# Altium PCB Main.PcbDoc (part 1 of 2)
Units mil, origin at the board's own origin, x right, y up, seen from the top; angles counter-clockwise.
Board outline 3937.01 x 3937.01 mil, 2 copper layers (Top Layer, Bottom Layer); 174 components, 113 nets, 601 pads, 322 vias.
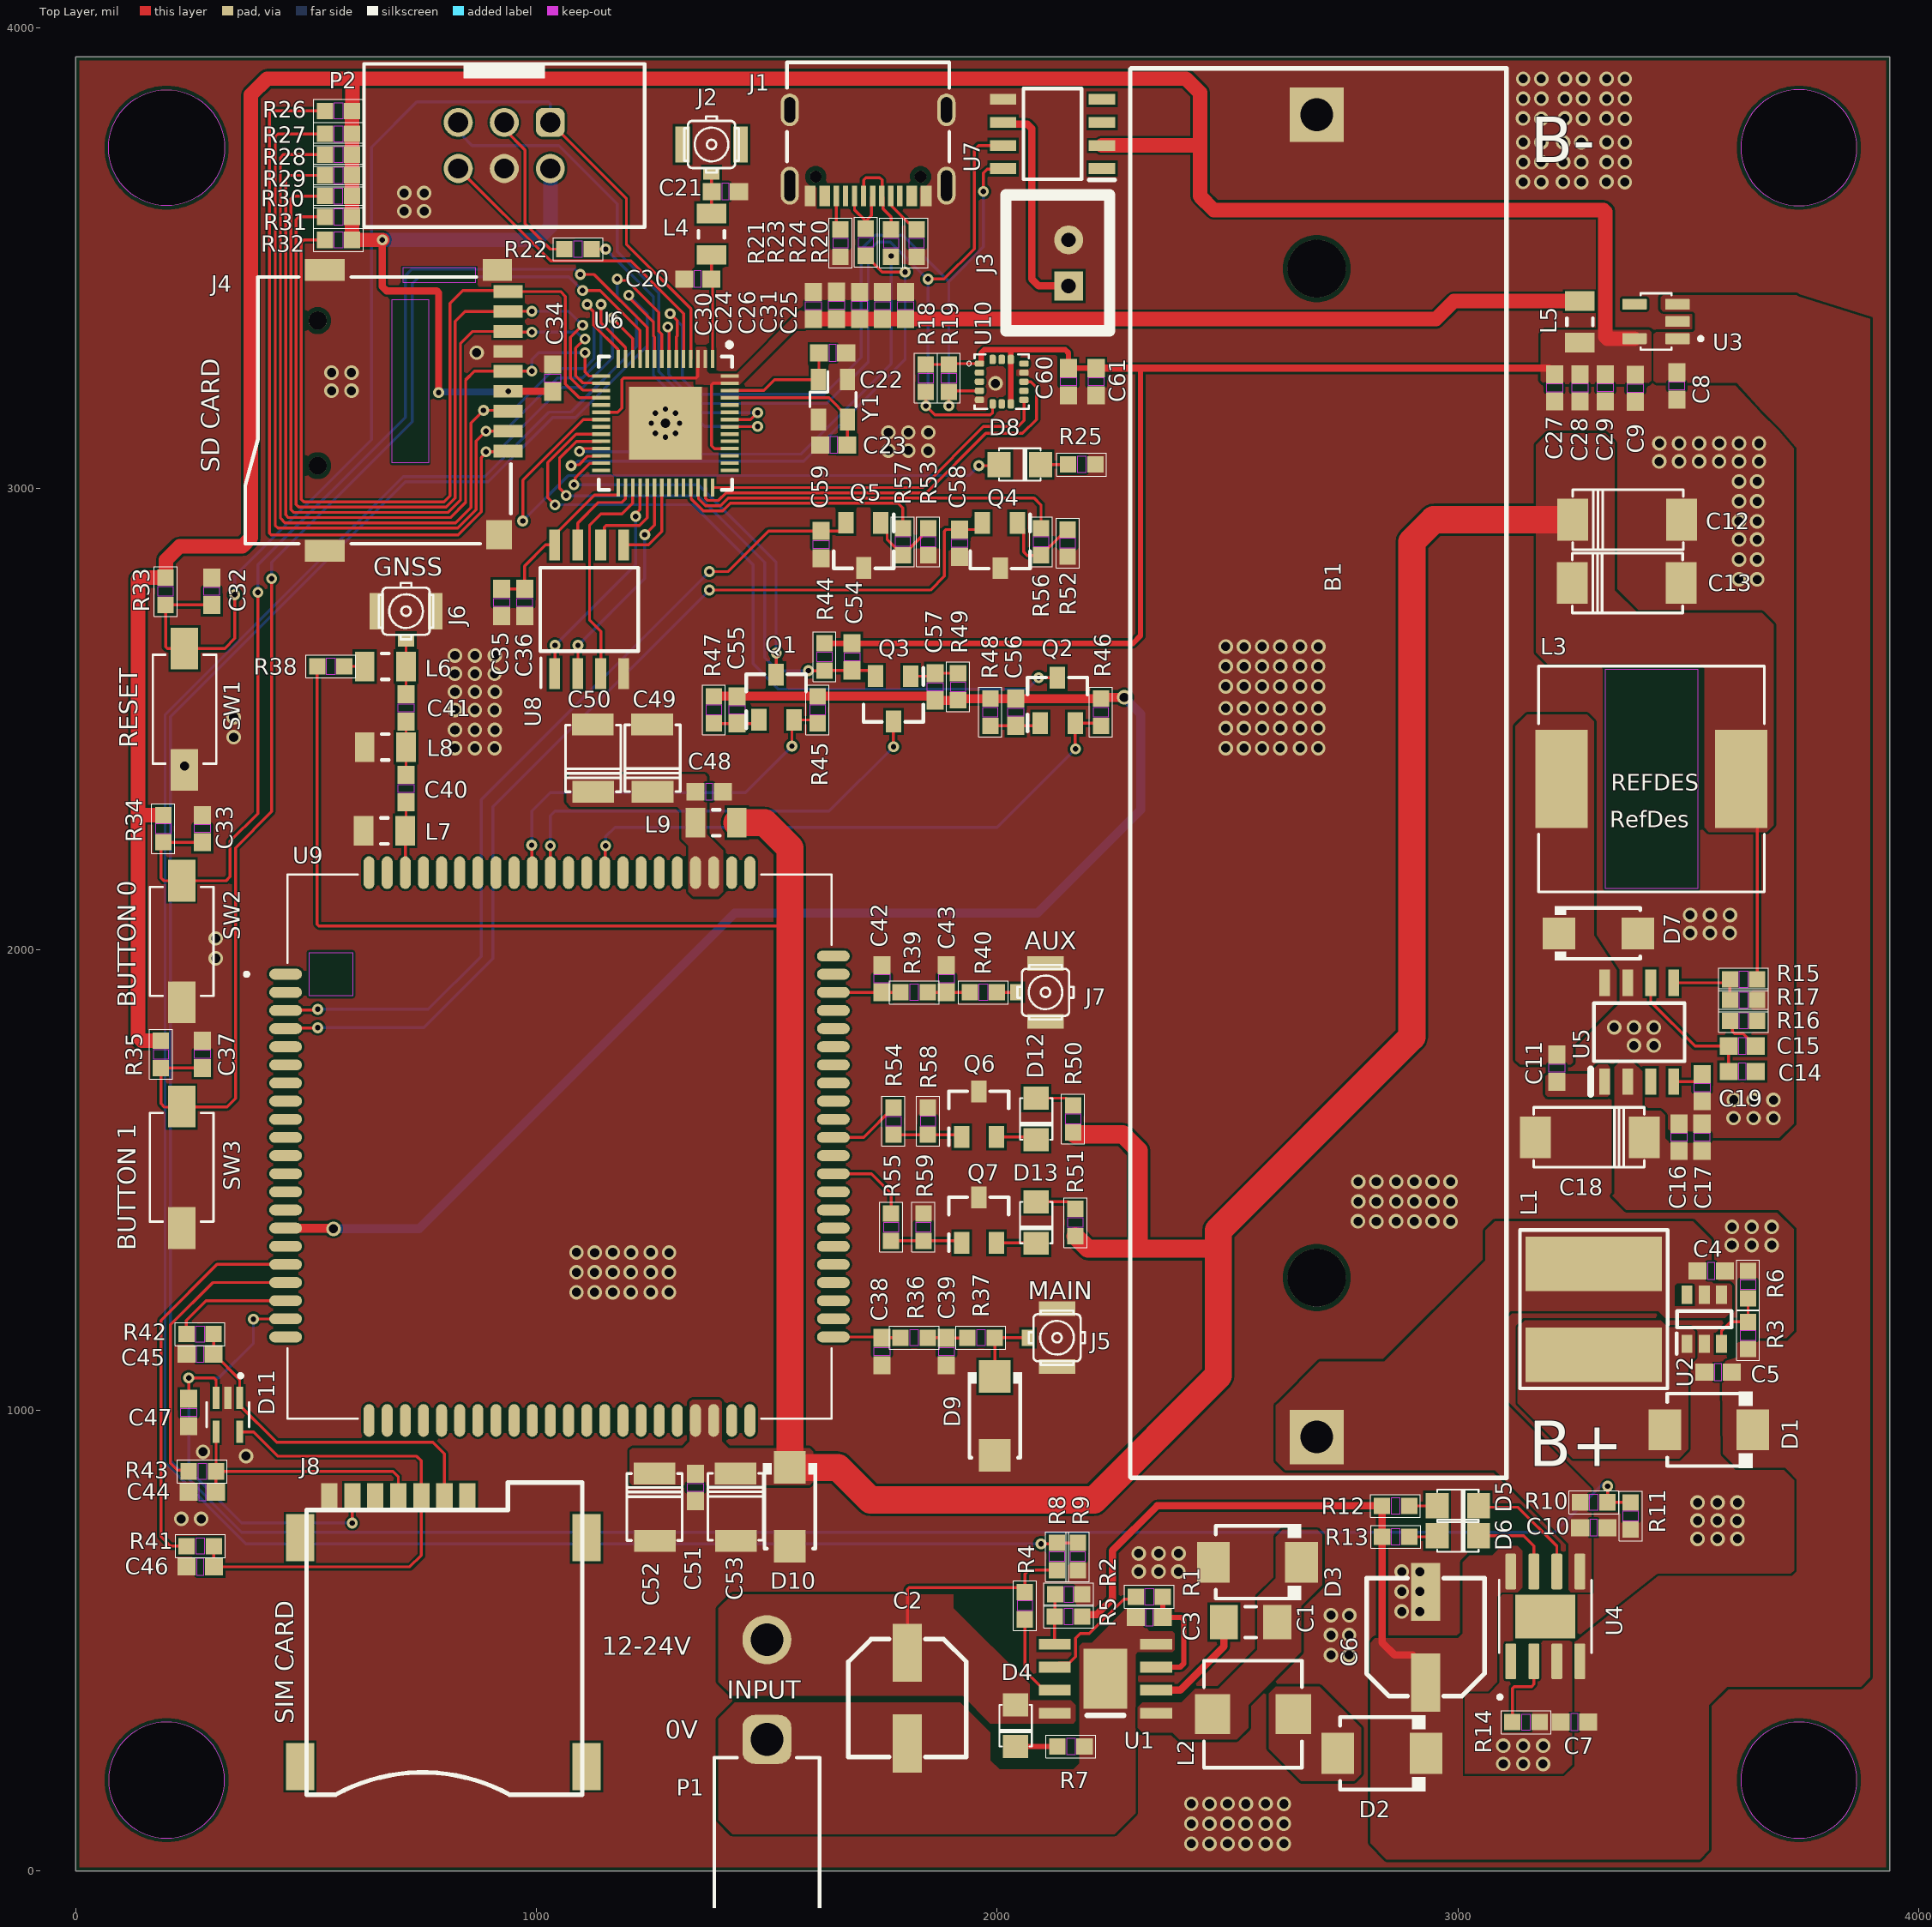
[diagram p0: Top Layer view]
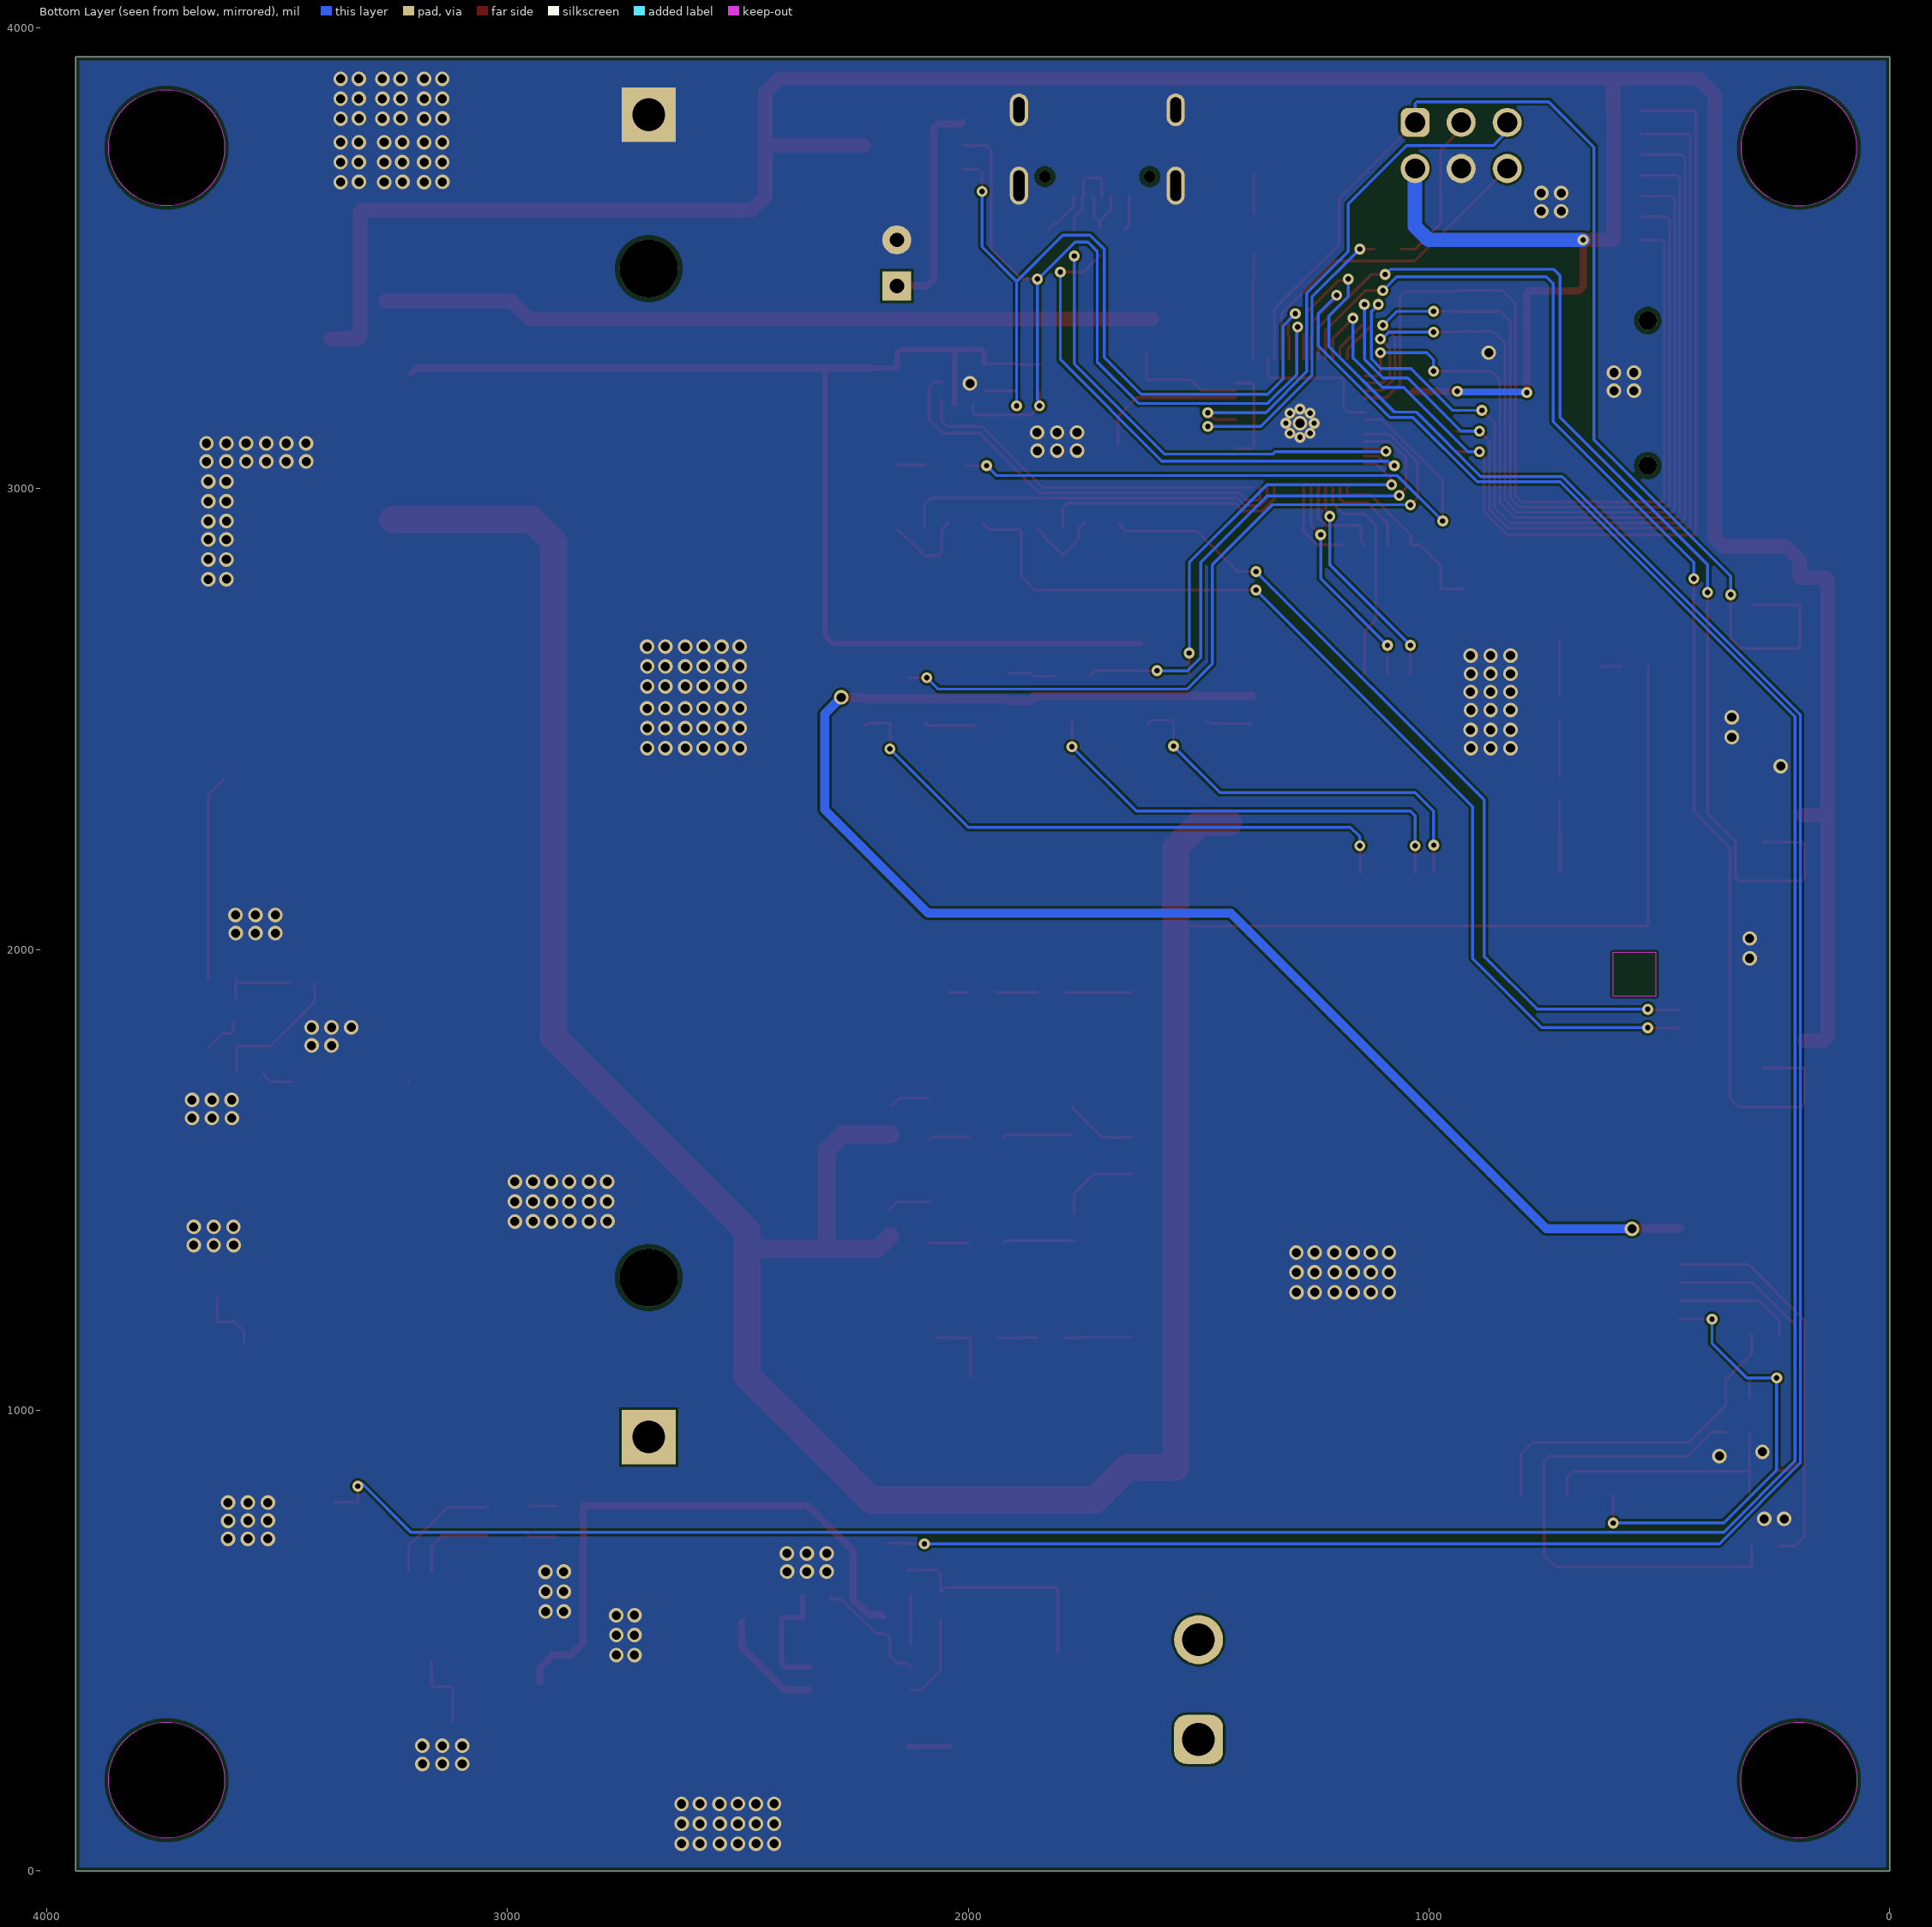
[diagram p1: Bottom Layer view, seen from below]
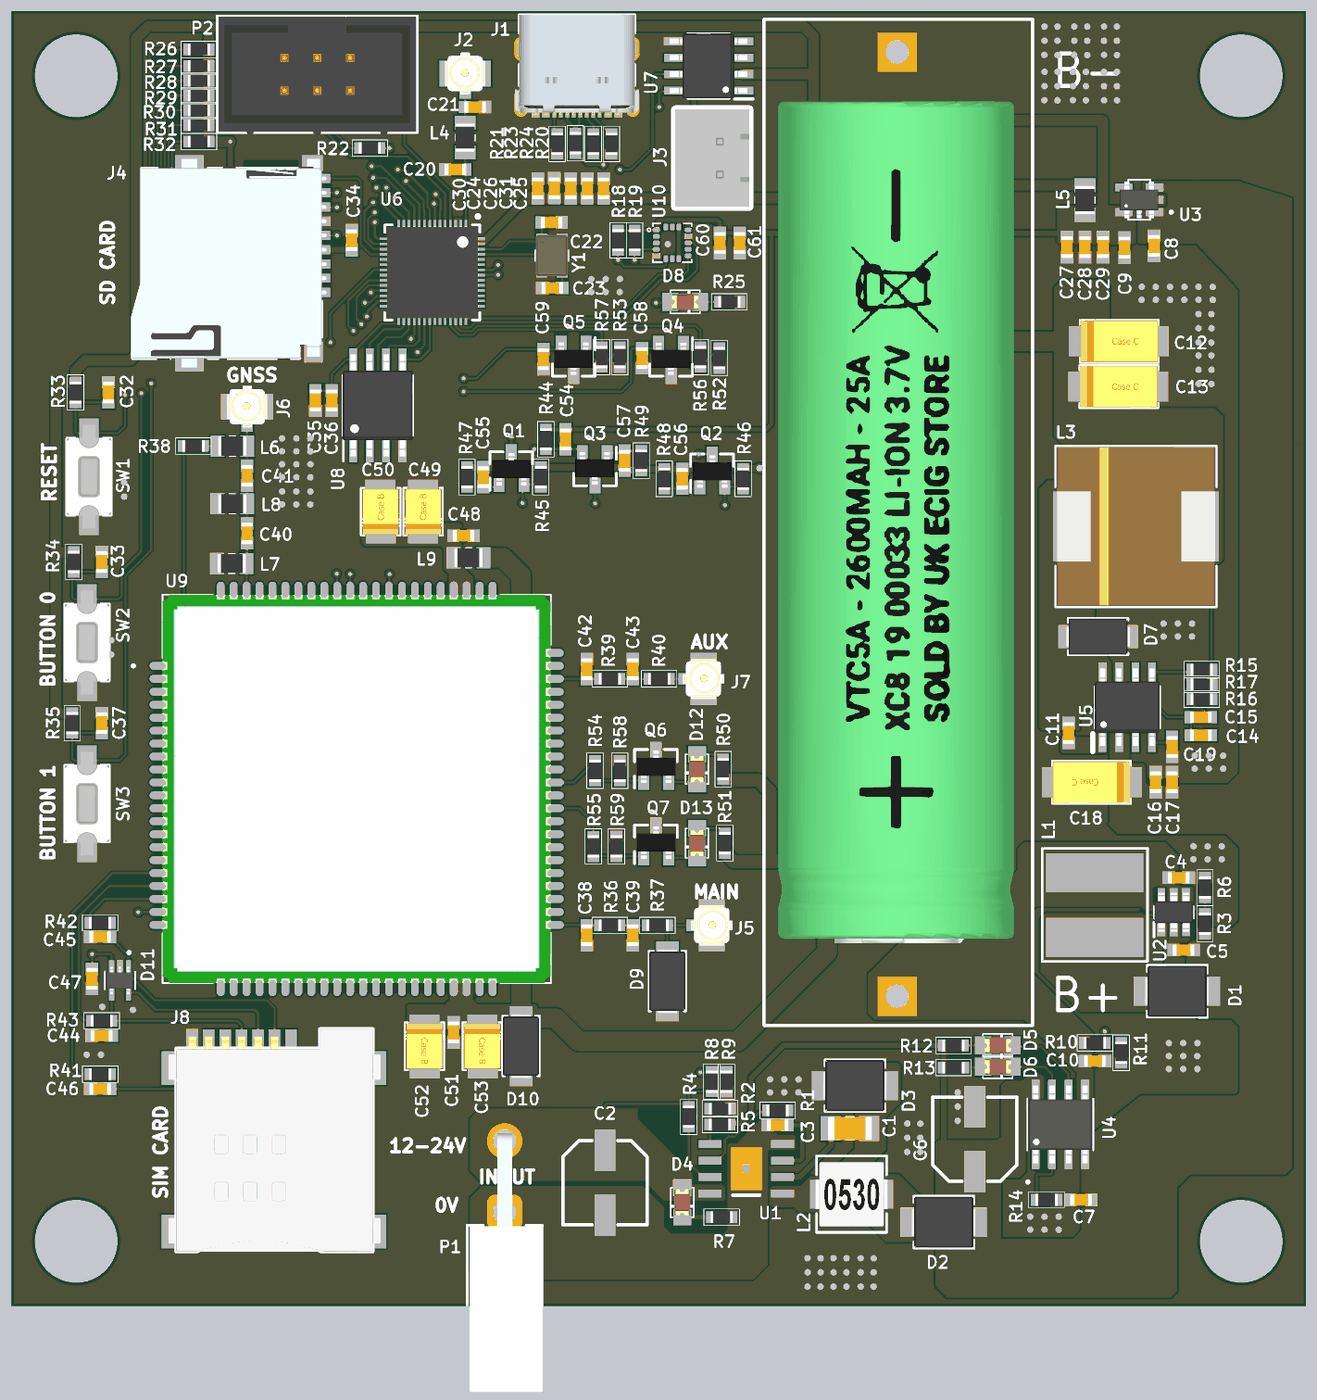
[diagram p3: 3D render of the assembled board from above, using the file's embedded part models]

## Layer stack, top to bottom
Top Solder: solder mask 0.4, Solder Resist, Dk 3.5
Top Layer: signal copper 1.4
Dielectric 1: dielectric 12.6, FR-4, Dk 4.8
Bottom Layer: signal copper 1.4
Bottom Solder: solder mask 0.4, Solder Resist, Dk 3.5

## Board outline
0,0 3937.01,0 3937.01,3937.01 0,3937.01
cut-out: 3614.17,3740.16 ccw(c3740.16,3740.16) 3740.16,3614.17 ccw(c3740.16,3740.16) 3866.14,3740.16 ccw(c3740.16,3740.16) 3740.16,3866.14 ccw(c3740.16,3740.16)
cut-out: 3614.17,196.85 ccw(c3740.16,196.85) 3740.16,70.87 ccw(c3740.16,196.85) 3866.14,196.85 ccw(c3740.16,196.85) 3740.16,322.84 ccw(c3740.16,196.85)
cut-out: 196.85,3614.17 cw(c196.85,3740.16) 70.87,3740.16 cw(c196.85,3740.16) 196.85,3866.14 cw(c196.85,3740.16) 322.83,3740.16 cw(c196.85,3740.16)
cut-out: 70.87,196.85 ccw(c196.85,196.85) 196.85,70.87 ccw(c196.85,196.85) 322.83,196.85 ccw(c196.85,196.85) 196.85,322.84 ccw(c196.85,196.85)

## Design rules (kind name [scope] priority, off if disabled: settings)
BoardOutlineClearance [All] p1: gap=7.87 ignorepadtopadclearanceinfootprint=FALSE
Clearance [All] p1: gap=5 ignorepadtopadclearanceinfootprint=TRUE except(9.84: Arc-Hole Track-Hole SMDPad-Hole THPad-Hole Via-Hole Fill-Hole Poly-Hole Region-Hole Text-Hole)
ComponentClearance [All] p1: gap=5 collisioncheckmode=3 verticalgap=5 showdistances=TRUE
DiffPairsRouting [All] p1: maxlimit=10 minlimit=5 mostfreqgap=5 toplayer_minwidth=5 toplayer_maxwidth=1000 toplayer_prefwidth=5 bottomlayer_minwidth=5 bottomlayer_maxwidth=1000 bottomlayer_prefwidth=5 maxuncoupledlength=500
Height [All] p1: minheight=0 maxheight=71497.94 prefheight=500
HoleSize [All] p1: absolutevalues=TRUE maxlimit=248.03 minlimit=11.81 maxpercent=80.000 minpercent=20.000
HoleToHoleClearance [All] p1: gap=9.84 allowstackedmicrovias=FALSE
MinimumAnnularRing [All] p1: minimumring=3
MinimumSolderMaskSliver [All] p1: minsoldermaskwidth=0
PlaneClearance [All] p1: clearance=5
PlaneConnect PlaneConnectPowerPads [InPadClass('PowerPads')] p1: planeconnectstyle=Direct reliefexpansion=20 reliefentries=4 reliefconductorwidth=10 reliefairgap=10
PlaneConnect [All] p2: pad.planeconnectstyle=Relief pad.reliefexpansion=11.81 pad.reliefentries=4 pad.reliefconductorwidth=5 pad.reliefairgap=5 via.planeconnectstyle=Direct via.reliefexpansion=11.81 via.reliefentries=4 via.reliefconductorwidth=5 via.reliefairgap=5
PolygonConnect PolygonConnectPowerPads [All vs (InPadClass('PowerPads'))] p1: connectstyle=Direct reliefconductorwidth=10 reliefentries=4 polygonreliefangle="90 Angle" airgapwidth=10
PolygonConnect [All] p2: connectstyle=Direct reliefconductorwidth=5 reliefentries=4 polygonreliefangle="90 Angle" airgapwidth=5
RoutingVias [All] p1: holewidth=11.81 width=23.62 viastyle="Through Hole" minholewidth=11.81 minwidth=23.62 maxholewidth=23.62 maxwidth=259.84
SilkToSilkClearance [All] p1: silktosilkclearance=0
SilkToSolderMaskClearance [IsPad] p1: minsilkscreentomaskgap=5 clearancetoexposedcopper=TRUE
SolderMaskExpansion [All] p1: expansion=0.5 istentingtop=FALSE
SupplyNets "Schematic Supply Nets_2" [InNet('+12V')] p1: voltage=0.000
SupplyNets "Schematic Supply Nets_8" [InNet('V-MCU')] p2: voltage=0.000
SupplyNets "Schematic Supply Nets_6" [InNet('V-SIM')] p3: voltage=0.000
SupplyNets "Schematic Supply Nets_7" [InNet('BATTERY-')] p4: voltage=0.000
SupplyNets "Schematic Supply Nets_5" [InNet('+1.8V')] p5: voltage=0.000
SupplyNets "Schematic Supply Nets_4" [InNet('+5V')] p6: voltage=0.000
SupplyNets "Schematic Supply Nets_1" [InNet('FL-VDD')] p7: voltage=0.000
SupplyNets "Schematic Supply Nets" [InNet('+3.3V-MCU')] p8: voltage=0.000
Width [All] p1: maxlimit=1000 minlimit=6.3 preferedwidth=6.3 minimp=50.000000 maximp=50.000000 favimp=50.000000
20 further rules are at their usual default settings.

## Classes and differential pairs
net class POWER: +5V V-MCU V-SIM
component class U_SIM7600CE: C38 C39 C40 C41 C42 C43 C44 C45 C46 C47 C48 C49 C50 C51 C52 C53 C54 C55 C56 C57 C58 C59 D9 D10 D11 D12 D13 J5 J6 J7 J8 L6 L7 L8 L9 Q1 Q2 Q3 Q4 Q5 Q6 Q7 R36 R37 R38 R39 R40 R41 R42 R43 R44 R45 R46 R47 R48 R49 R50 R51 R52 R53 R54 R55 R56 R57 R58 R59 U9
component class U_Power: B1 C1 C2 C3 C4 C5 C6 C7 C8 C9 C10 C11 C12 C13 C14 C15 C16 C17 C18 C19 D1 D2 D3 D4 D5 D6 D7 L1 L2 L3 P1 R1 R2 R3 R4 R5 R6 R7 R8 R9 R10 R11 R12 R13 R14 R15 R16 R17 U1 U2 U3 U4 U5
component class U_LIS3DH: C60 C61 U10
component class U_ESP32S3: C20 C21 C22 C23 C24 C25 C26 C27 C28 C29 C30 C31 C32 C33 C34 C35 C36 C37 D8 J1 J2 J3 J4 L4 L5 P2 R18 R19 R20 R21 R22 R23 R24 R25 R26 R27 R28 R29 R30 R31 R32 R33 R34 R35 SW1 SW2 SW3 U6 U7 U8 Y1

## Components (designator, comment, footprint, x,y, rotation, side; value= is the part's Value field where it differs from the comment)
B1 "21700-1C" 18650-2C 2279.75,2372.19 r90 top
C1 "0.1uF" CAP_1206 2550,540 r0 top
C2 "22u" ALU-SMD-CAP-D-6.3mm 1805,375 r270 top
C3 "1u" CAP_0603 2330,550 r0 top
C4 "22u" CAP_0603 3549.75,1302.19 r180 top
C5 "22u" CAP_0603 3564.75,1082.19 r0 top
C6 "100u" ALU-SMD-CAP-D-6.3mm 2929.75,507.19 r90 top
C7 "10u" CAP_0603 3252.87,322.76 r0 top
C8 "1u" CAP_0603 3474.96,3222.96 r90 top
C9 "1u" CAP_0603 3384.96,3217.96 r90 top
C10 "10u" CAP_0603 3295,745 r180 top
C11 "0.1u" CAP_0603 3214.75,1742.19 r90 top
C12 "47u" C_Tanta_C6032 3249.03,2932.82 r0 top
C13 "47u" C_Tanta_C6032 3248.03,2795.28 r0 top
C14 "33p" CAP_0603 3617.19,1735.25 r180 top
C15 "1n" CAP_0603 3617.19,1790.25 r180 top
C16 "105" CAP_0603 3479.75,1592.19 r270 top
C17 "104" CAP_0603 3529.75,1592.19 r270 top
C18 "47u" C_Tanta_C6032 3404.75,1592.19 r180 top
C19 "10n" CAP_0603 3530,1700 r90 top
C20 "NP" CAP_0603 1350,3455 r0 top
C21 "1.8p" CAP_0603 1410,3645 r180 top
C22 "22p" CAP_0603 1642.5,3294.44 r180 top
C23 "22p" CAP_0603 1645,3095 r180 top
C24 "106" CAP_0603 1651.04,3397.98 r270 top
C25 "105" CAP_0603 1801.04,3397.5 r270 top
C26 "104" CAP_0603 1701.04,3397.5 r270 top
C27 "105" CAP_0603 3209.9,3218.99 r90 top
C28 "104" CAP_0603 3264.9,3218.99 r90 top
C29 "104" CAP_0603 3319.9,3218.99 r270 top
C30 "105" CAP_0603 1601.04,3397.5 r270 top
C31 "104" CAP_0603 1751.04,3397.5 r270 top
C32 "104" CAP_0603 294.75,2777.19 r90 top
C33 "104" CAP_0603 274.75,2262.19 r90 top
C34 "104" CAP_0603 1035,3240 r270 top
C35 "105" CAP_0603 924.28,2753.18 r90 top
C36 "106" CAP_0603 974.28,2753.18 r90 top
C37 "104" CAP_0603 274.75,1772.19 r90 top
C38 "Cap_NP" CAP_0603 1749.75,1127.19 r90 top
C39 "Cap_NP" CAP_0603 1889.75,1127.19 r90 top
C40 "Cap_NP" CAP_0603 716.73,2349.19 r270 top
C41 "33p" CAP_0603 716.73,2524.19 r270 top
C42 "Cap_NP" CAP_0603 1749.75,1936.37 r270 top
C43 "Cap_NP" CAP_0603 1889.75,1936.37 r270 top
C44 "22p" CAP_0603 274.53,822 r180 top
C45 "22p" CAP_0603 269.53,1122 r180 top
C46 "22p" CAP_0603 270,660 r180 top
C47 "104" CAP_0603 245,995 r270 top
C48 "1u" CAP_0603 1374.75,2342.19 r180 top
C49 "100u" C_Tanta_B3528 1251.97,2342.52 r90 top
C50 "100u" C_Tanta_B3528 1123.05,2342.19 r90 top
C51 "100n" CAP_0603 1344.75,832.19 r90 top
C52 "100u" C_Tanta_B3528 1255.91,862.2 r270 top
C53 "100u" C_Tanta_B3528 1432.07,862.54 r270 top
C54 "470p" CAP_0603 1685,2635 r90 top
C55 "102" CAP_0603 1435,2520 r270 top
C56 "102" CAP_0603 2040,2515 r270 top
C57 "102" CAP_0603 1865,2570 r90 top
C58 "104" CAP_0603 1917.94,2881.82 r270 top
C59 "104" CAP_0603 1617.68,2878.73 r270 top
C60 "104" CAP_0603 2154.75,3232.19 r90 top
C61 "104" CAP_0603 2214.75,3232.19 r90 top
D1 "SS54" SMB 3544.75,957.19 r180 top
D2 "SS54" SMB 2835,255 r180 top
D3 "SS54" SMB 2565,670 r180 top
D4 "" LED-0805-Red 2040,360 r270 top
D5 "LED" LED-0805-Red 2954.75,792.19 r0 top
D6 "LED" LED-0805-Red 2954.75,727.19 r0 top
D7 "SS34" SMA 3305,2035 r0 top
D8 "" LED-0805-Red 2003.9,3052.63 r0 top
D9 "SMAJ5.0" SMA 1994.75,987.19 r270 top
D10 "SMAJ5.0" SMA 1550,790 r270 top
D11 "ESDA6V1W5" SOT65P210X110-5N 330,990 r270 top
D12 "LED" LED-0805-Red 2084.75,1677.19 r270 top
D13 "LED" LED-0805-Red 2084.75,1452.19 r270 top
J1 "629722000214" 629722000214 1719.75,3777.19 r180 top
J2 "ANT_CONN" IPEX 1379.75,3747.19 r270 top
J3 "NTC 10K" XH2.54M-2 2155,3440 r90 top
J4 "693071040911" 693071040911 719.88,3170.08 r270 top
J5 "ANT_CONN" IPEX 2129.75,1157.19 r180 top
J6 "ANT_CONN" IPEX 716.73,2734.19 r270 top
J7 "ANT_CONN" IPEX 2104.75,1906.84 r180 top
J8 "MicroSimcard" "MICRO SIM SOCKET" 797.64,520.81 r0 top
L1 "10uH" CD75 3294.75,1317.19 r180 top
L2 "4.7uH" IND-0520 2555,340 r0 top
L3 "4.7uH-3A" IND_CDRH127-4R7NC_SUM 3420,2370 r0 top
L4 "3nH" INDC-0805 1379.75,3552.19 r90 top
L5 "2.7nH" INDC-0805 3264.75,3362.19 r270 top
L6 "47n" INDC-0805 671.73,2614.19 r180 top
L7 "L_NP" INDC-0805 669.75,2257.19 r0 top
L8 "L_NP" INDC-0805 671.73,2439.19 r0 top
L9 "FB-30R" INDC-0805 1390,2275 r0 top
P1 "64900229522" 64900229522 1500,-10 r0 top
P2 "61200621621" 61200621621 930,3745 r180 top
Q1 "2N3904" SOT-23 1519.75,2547.19 r0 top
Q2 "2N3904" SOT-23 2130.55,2540.36 r0 top
Q3 "2N3904" SOT-23 1774.95,2543.96 r180 top
Q4 "BC817" SOT-23 2006.53,2876.72 r180 top
Q5 "BC817" SOT-23 1710.43,2876.92 r180 top
Q6 "BC817" SOT-23 1959.75,1642.19 r0 top
Q7 "BC817" SOT-23 1959.75,1412.19 r0 top
R1 "100k" RES_0603 2330,595 r0 top
R2 "110K" RES_0603 2154.75,552.19 r0 top
R3 "91K" RES_0603 3629.75,1162.19 r270 top
R4 "10K" RES_0603 2060,575.47 r90 top
R5 "20k" RES_0603 2155,600 r180 top
R6 "12k" RES_0603 3629.75,1272.19 r270 top
R7 "10K" RES_0603 2160,270 r0 top
R8 "100K" RES_0603 2129.75,682.19 r90 top
R9 "10K" RES_0603 2174.75,682.19 r270 top
R10 "100K" RES_0603 3295,800 r0 top
R11 "10K" RES_0603 3375,770 r270 top
R12 "1K" RES_0603 2864.75,792.19 r180 top
R13 "1K" RES_0603 2865,725 r180 top
R14 "1.2K" RES_0603 3147.87,322.76 r0 top
R15 "10K/1%" RES_0603 3620,1935 r0 top
R16 "30K/1%" RES_0603 3620,1845 r180 top
R17 "2.5K/1%" RES_0603 3620,1890 r180 top
R18 "10K" RES_0603 1845,3240 r90 top
R19 "10K" RES_0603 1895,3240 r90 top
R20 "5.1K" RES_0603 1824.75,3533.11 r270 top
R21 "5.1K" RES_0603 1659.75,3533.11 r270 top
R22 "30R" RES_0603 1090,3520 r180 top
R23 "0R" RES_0603 1714.75,3535.11 r90 top
R24 "0R" RES_0603 1769.75,3533.11 r90 top
R25 "330" RES_0603 2183.43,3052.63 r0 top
R26 "10K" RES_0603 570,3820 r0 top
R27 "10K" RES_0603 570,3770 r0 top
R28 "10K" RES_0603 570,3725 r0 top
R29 "10K" RES_0603 570,3680 r0 top
R30 "10K" RES_0603 570,3635 r0 top
R31 "10K" RES_0603 570,3590 r0 top
R32 "10K" RES_0603 570,3540 r0 top
R33 "10K" RES_0603 194.75,2777.19 r90 top
R34 "10K" RES_0603 189.75,2262.19 r90 top
R35 "10K" RES_0603 184.75,1772.19 r90 top
R36 "0R" RES_0603 1819.75,1157.19 r0 top
R37 "0R" RES_0603 1964.75,1157.19 r0 top
R38 "10R" RES_0603 553.45,2614.36 r0 top
R39 "0R" RES_0603 1819.75,1906.84 r0 top
R40 "0R" RES_0603 1969.75,1906.84 r0 top
R41 "51R" RES_0603 270,705 r180 top
R42 "51R" RES_0603 269.53,1165 r180 top
R43 "51R" RES_0603 274.53,867 r180 top
R44 "1K" RES_0603 1625,2635 r90 top
R45 "1K" RES_0603 1610,2520 r270 top
R46 "1K" RES_0603 2225,2515 r270 top
R47 "4.7K" RES_0603 1385,2520 r270 top
R48 "4.7K" RES_0603 1985,2515 r270 top
R49 "4.7K" RES_0603 1915,2570 r90 top
R50 "1K" RES_0603 2164.75,1632.19 r270 top
R51 "1K" RES_0603 2169.75,1407.19 r270 top
R52 "47K" RES_0603 2152.94,2881.82 r270 top
R53 "47K" RES_0603 1850,2885 r270 top
R54 "4.7K" RES_0603 1774.75,1627.19 r90 top
R55 "4.7K" RES_0603 1769.75,1397.19 r90 top
R56 "4.7K" RES_0603 2095,2885 r270 top
R57 "4.7K" RES_0603 1795,2885 r270 top
R58 "47K" RES_0603 1849.75,1627.19 r270 top
R59 "47K" RES_0603 1839.75,1397.19 r270 top
SW1 "434121050816" 434121050816 235.73,2521.43 r90 top
SW2 "434121050816" 434121050816 229.75,2017.19 r90 top
SW3 "434121050816" 434121050816 229.75,1527.19 r90 top
U1 "MP2482" SOP8-P 2234.75,417.19 r90 top
U2 "SX1308" SOT23-6 3534.75,1197.19 r90 top
U3 "AP2112K-3.3TRG1" SOT95P285X140-5N 3429.96,3362.96 r180 top
U4 "TP4056" SOP127P600X175-9N 3189.75,552.19 r90 top
U5 "TPS54231" SOIC8-1.75H 3393.53,1820.35 r90 top
U6 "ESP32-S3" QFN56 1279.75,3142.19 r270 top
U7 "DS3231M" SOP8-P1.27 2120,3770 r180 top
U8 "W25Q128" SOIC127P790X216-8N 1114.28,2738.18 r90 top
U9 "SIM7600E" XCVR_SIM7600E 1049.75,1572.19 r0 top
U10 "LIS3DSH" LGA16R50P5X3_300X300X100N 2009.75,3232.19 r0 top
Y1 "40MHz" Y-3225 1647.5,3194.44 r270 top

## Footprints (in the part's own frame and the unit in brackets; to place one, negate y for a bottom-side part, rotate by r counter-clockwise, add the part's x,y. Pads: shape width x height; smd on the part's side, far side on the other; paste and mask are expansions set on the pad)
18650-2C [mm] "2Cell 18650 battery holder"
  rect 3x3 hole 1.8: 1(-36.334,-10.51) 2(36.566,-10.51)
  round 3.2 hole 3.2 unplated: ""(-27.544,-10.51) ""(28.076,-10.51)
  silkscreen extent -38.58,-20.97 39.12,-0.22, body extent -38.57,-20.96 39.13,-0.23, height 21.8
61200621621 [mm] "6 pins, straight, gold plating"
  rrect50% 1.6x1.6 hole 1.1: 1(-2.54,-1.27)
  round 1.6 hole 1.1: 2(-2.54,1.27) 3(0,-1.27) 4(0,1.27) 5(2.54,-1.27) 6(2.54,1.27)
  silkscreen extent -7.74,-4.5 7.74,4.5, body extent -7.64,-4.43 7.64,4.75, height 9.13
64900229522 [mm] "4.20mm Male Dual Row Angled Header, 2p"
  rrect50% 2.7x2.7 hole 1.8: 1(0,7.5)
  round 2.7 hole 1.8: 2(0,13)
  silkscreen extent -2.9,-6.5 2.9,6.5, body extent -2.7,-6.4 3.02,13.57, height 11.43
434121050816 [mm] "SMD Tact Switch, body 6x3.5mm"
  rect 2.3x1.5 smd: 1(-3.35,0) 2(3.35,0)
  silkscreen extent -3,-1.75 3,1.75, body extent -4,-1.75 4,1.75, height 5
629722000214 [mm] "USB TYPE C VERTICAL PLUG"
  rect 0.6x1.14 smd: A1/B12(-3.2,3.605) A4/B9(-2.4,3.605) A9/B4(2.4,3.605) A12/B1(3.2,3.605)
  rect 0.3x1.14 smd: A5(-1.25,3.605) A6(-0.25,3.605) A7(0.25,3.605) A8(1.25,3.605) B5(1.75,3.605) B6(0.75,3.605) B7(-0.75,3.605) B8(-1.75,3.605)
  round 0.65 hole 0.65 unplated: MH1(-2.89,2.535) MH2(2.89,2.535)
  oval 1x2.1 hole 0.6 slot 1.7 at 90 deg: Shell(-4.32,3.035) Shell(4.32,3.035)
  oval 1x1.8 hole 0.6 slot 1.4 at 90 deg: Shell(-4.32,-1.145) Shell(4.32,-1.145)
  silkscreen extent -4.47,-3.76 4.47,1.69, body extent -4.79,-3.76 4.79,3.95, height 3.33
693071040911 [mm] "MicroSD push-push CD SMT"
  rect 0.7x1.6 smd: 1(2.25,5.55) 2(1.15,5.55) 3(0.05,5.55) 4(-1.05,5.55) 5(-2.15,5.55) 6(-3.25,5.55) 7(-4.35,5.55) 8(-5.45,5.55) 9(-6.55,5.55)
  round 1 hole 1 unplated: MH1(-4.95,-4.95) MH2(3.05,-4.95)
  rect 1.2x1.6 smd: Shell(-7.75,4.95)
  rect 1.2x2.2 smd: Shell(-7.75,-4.55) Shell(7.75,-4.55)
  rect 1.6x1.4 smd: Shell(6.85,5.05)
  Top Layer keep-out region: -7.05,3.75 -7.85,3.75 -7.85,-0.25 -7.05,-0.25
  Top Layer keep-out region: -6.1,1.15 2.9,1.15 2.9,-0.85 -6.1,-0.85
  silkscreen extent -7.35,-8.95 7.35,5.7, body extent -8.05,-8.95 8.05,6.05, height 1.9
ALU-SMD-CAP-D-6.3mm [mm]
  rect 3.2x1.6 smd: 1(-2.5,0) 2(2.5,0)
  silkscreen extent -3.25,-3.25 3.25,3.25, body extent -3.64,-3.3 3.66,3.3, height 5.8
C_Tanta_B3528 [mm]
  rect 1.2x2.3 smd: 1(0,0) 2(3.708,0.025)
  silkscreen extent 0,-1.52 3.68,1.52, body extent 0.08,-1.4 3.58,1.4, height 1.9
C_Tanta_C6032 [mm]
  rect 1.7x2.3 smd: 1(0,0) 2(6,0)
  silkscreen extent 0,-1.65 6.1,1.65, body extent 0.05,-1.6 6.05,1.6, height 2.5
CAP_0603 [mm] "Chip Capacitor, 2-Leads, Body 1.60x0.80mm, IPC Medium Density"
  rect 1x0.95 smd: 1(-0.75,0) 2(0.75,0)
  Top Layer keep-out region: -0.203,-0.457 0.203,-0.457 0.203,0.457 -0.203,0.457
  body extent -0.85,-0.45 0.85,0.45, height 0.9
CAP_1206 [mm] "Chip Capacitor, 2-Leads, Body 3.20x1.60mm, IPC Low Density"
  rect 1.55x1.9 smd: 1(-1.475,0) 2(1.475,0)
  silkscreen extent -0.3,-0.85 0.3,0.85, body extent -1.7,-0.9 1.7,0.9, height 1.05
CD75 [mm]
  rect 7.5x3 smd: 1(0,0) 2(0,5)
  silkscreen extent -4.08,-1.88 4.06,6.86, body extent -3.5,-1.29 3.5,6.37, height 5.04
IND-0520 [mm] "Molded Inductor, 2-Leads, Body 5.20x5.70mm, IPC Medium Density"
  rect 1.95x2.2 smd: 1(-2.225,0) 2(2.225,0)
  silkscreen extent -2.7,-2.95 2.7,2.95, body extent -2.8,-2.5 2.8,2.5, height 3.01
IND_CDRH127-4R7NC_SUM [mil]
  rect 114x213 smd paste+0 mask+0: 1(-195,0) 2(195,0)
  Top Layer keep-out region: -100,-238 -100,238 100,238 100,-238
  silkscreen extent -245,-245 245,245, body extent -240,-240 240,240, height 315
INDC-0805 [mm] "Chip Inductor, 2-Leads, Body 2.10x1.35mm, IPC Low Density"
  rect 1.08x1.63 smd: 1(-1.14,0) 2(1.14,0)
  silkscreen extent -0.2,-0.72 0.2,0.72, body extent -1.1,-0.75 1.1,0.75, height 1
IPEX [mil] "IPX surface mount receptacle plug"
  rect 27.56x35.43 smd: 1(62.99,0)
  rect 78.74x31.5 smd: 2(0,62.99) 2(0,-62.99)
  silkscreen extent -61,-59 61,59, body extent -61,-60 57,58, height 49
LED-0805-Red [mil]
  rect 50x55 smd: 1(0,0) 2(90,0)
  silkscreen extent 0,-35 90,37, body extent 5,-25 85,25, height 43
LGA16R50P5X3_300X300X100N [mm]
  rrect53% 0.52x0.35 smd mask+0: 1(-1.225,1) 2(-1.225,0.5) 3(-1.225,0) 4(-1.225,-0.5) 5(-1.225,-1) 9(1.225,-1) 10(1.225,-0.5) 11(1.225,0) 12(1.225,0.5) 13(1.225,1)
  rrect53% 0.35x0.52 smd mask+0: 6(-0.5,-1.225) 7(0,-1.225) 8(0.5,-1.225) 14(0.5,1.225) 15(0,1.225) 16(-0.5,1.225)
  silkscreen extent -1.93,-1.5 1.5,1.5
"MICRO SIM SOCKET" [mm]
  rect 0.9x1.35 smd: 1(-5.02,7.473) 2(-2.48,7.473) 3(0.06,7.473) 5(-6.29,7.473) 6(-3.75,7.473) 7(-1.21,7.473) 8(1.33,7.473)
  rect 1.55x2.6 smd: 4(-7.9,-7.472) 4(-7.9,5.148) 4(7.9,-7.472) 4(7.9,5.148)
  silkscreen extent -7.54,-9.03 7.66,8.17, body extent -8.14,-9.03 8.26,8.17, height 1.36
QFN56 [mm] "QFN, 56-Leads, Body 7.00x7.00mm, Pitch 0.40mm, Thermal Pad 4.00x4.00mm, IPC Low Density"
  rect 1x0.2 smd: 1(-3.55,2.6) 2(-3.55,2.2) 3(-3.55,1.8) 4(-3.55,1.4) 5(-3.55,1) 6(-3.55,0.6) 7(-3.55,0.2) 8(-3.55,-0.2) 9(-3.55,-0.6) 10(-3.55,-1) 11(-3.55,-1.4) 12(-3.55,-1.8) 13(-3.55,-2.2) 14(-3.55,-2.6) 29(3.55,-2.6) 30(3.55,-2.2) 31(3.55,-1.8) 32(3.55,-1.4) 33(3.55,-1) 34(3.55,-0.6) 35(3.55,-0.2) 36(3.55,0.2) 37(3.55,0.6) 38(3.55,1) 39(3.55,1.4) 40(3.55,1.8) 41(3.55,2.2) 42(3.55,2.6)
  rect 0.2x1 smd: 15(-2.6,-3.55) 16(-2.2,-3.55) 17(-1.8,-3.55) 18(-1.4,-3.55) 19(-1,-3.55) 20(-0.6,-3.55) 21(-0.2,-3.55) 22(0.2,-3.55) 23(0.6,-3.55) 24(1,-3.55) 25(1.4,-3.55) 26(1.8,-3.55) 27(2.2,-3.55) 28(2.6,-3.55) 43(2.6,3.55) 44(2.2,3.55) 45(1.8,3.55) 46(1.4,3.55) 47(1,3.55) 48(0.6,3.55) 49(0.2,3.55) 50(-0.2,3.55) 51(-0.6,3.55) 52(-1,3.55) 53(-1.4,3.55) 54(-1.8,3.55) 55(-2.2,3.55) 56(-2.6,3.55)
  rect 4x4 smd: 57(0,0)
  silkscreen extent -4.45,-3.67 3.67,3.68, body extent -3.55,-3.55 3.55,3.55, height 0.9
RES_0603 [mm] "Chip Resistor, 2-Leads, Body 1.60x0.80mm, IPC Medium Density"
  rect 0.9x0.9 smd: 1(-0.75,0) 2(0.75,0)
  Top Layer keep-out region: -0.254,-0.432 0.254,-0.432 0.254,0.432 -0.254,0.432
  silkscreen extent -1.37,-0.64 1.37,0.64, body extent -0.85,-0.45 0.85,0.45, height 0.45
SMA [mm] "Molded Diode, 2-Leads, Body 4.31x2.49mm, IPC Low Density"
  rect 1.8x1.75 smd: 1(2.175,0) 2(-2.175,0)
  silkscreen extent -2.41,-1.5 2.3,1.5, body extent -2.5,-1.4 2.5,1.4, height 2.31
SMB [mm] "Molded Diode, 2-Leads, Body 4.31x3.62mm, IPC Low Density"
  rect 1.8x2.25 smd: 1(2.425,0) 2(-2.425,0)
  silkscreen extent -2.41,-2.11 2.3,2.11, body extent -2.5,-1.97 2.5,1.97, height 2.62
SOIC8-1.75H [mm] "SOIC, 8-Leads, Body 4.91x3.90mm, Pitch 1.27mm, IPC Medium Density"
  rect 1.45x0.6 smd: 1(-2.725,1.905) 2(-2.725,0.635) 3(-2.725,-0.635) 4(-2.725,-1.905) 5(2.725,-1.905) 6(2.725,-0.635) 7(2.725,0.635) 8(2.725,1.905)
  silkscreen extent -3.43,-2.5 1.6,2.67, body extent -3,-2.5 3,2.5, height 1.75
SOIC127P790X216-8N [mm] "SOIC, 8-Leads, Body 5.28x5.28mm, Pitch 1.27mm, IPC Medium Density"
  rect 1.7x0.6 smd: 1(-3.55,1.905) 2(-3.55,0.635) 3(-3.55,-0.635) 4(-3.55,-1.905) 5(3.55,-1.905) 6(3.55,-0.635) 7(3.55,0.635) 8(3.55,1.905)
  silkscreen extent -4.32,-2.7 2.3,2.7, body extent -3.95,-2.7 3.95,2.7, height 2.16
SOP8-P [mm]
  rect 0.6x1.75 smd: 1(-1.905,-2.8) 2(-0.635,-2.8) 3(0.635,-2.8) 4(1.905,-2.8) 5(1.905,2.8) 6(0.635,2.8) 7(-0.635,2.8) 8(-1.905,2.8)
  rect 3.3x2.41 smd paste-3: EXP(0,0)
  silkscreen extent -2.03,-1.02 -2.03,1.02
SOP8-P1.27 [mm] "SOP, 8-Leads, Body 4.90x3.90mm, Pitch 1.27mm, IPC Medium Density"
  rect 1.45x0.6 smd: 1(-2.725,1.905) 2(-2.725,0.635) 3(-2.725,-0.635) 4(-2.725,-1.905) 5(2.725,-1.905) 6(2.725,-0.635) 7(2.725,0.635) 8(2.725,1.905)
  silkscreen extent -3.43,-2.5 1.6,2.54, body extent -3,-2.5 3,2.5, height 1.75
SOP127P600X175-9N [mm]
  rrect25% 1.97x0.6 smd: 1(-2.475,1.905) 2(-2.475,0.635) 3(-2.475,-0.635) 4(-2.475,-1.905) 5(2.475,-1.905) 6(2.475,-0.635) 7(2.475,0.635) 8(2.475,1.905)
  rect 2.413x3.302 smd paste-3: 9(0,0)
  silkscreen extent -4.54,-2.55 2,2.6, body extent -3,-2.45 3,2.45, height 1.75
SOT23-6 [mm] "SOT23, 6-Leads, Body 2.90x2.80mm, Pitch 0.95mm, IPC Medium Density"
  rect 1x0.6 smd: 1(-1.35,0.95) 2(-1.35,0) 3(-1.35,-0.95) 4(1.35,-0.95) 5(1.35,0) 6(1.35,0.95)
  silkscreen extent -1.91,-1.5 0.45,1.52, body extent -1.5,-1.5 1.5,1.5, height 1.45
SOT65P210X110-5N [mm]
  rect 1.23x0.4 smd: 1(-0.94,0.65) 2(-0.94,0) 3(-0.94,-0.65) 4(0.94,-0.65) 5(0.94,0.65)
  silkscreen extent -2.25,-1.17 0.68,1.17, body extent -1.05,-1 1.05,1, height 1.1
SOT95P285X140-5N [mm]
  rrect15% 1.35x0.6 smd: 1(-1.185,0.95) 2(-1.185,0) 3(-1.185,-0.95) 4(1.185,-0.95) 5(1.185,0.95)
  silkscreen extent -2.57,-1.55 0.85,1.55, body extent -1.5,-1.4 1.5,1.4, height 1.4
SOT-23 [mm] "SOT 23 _ 1-3-2"
  rect 0.85x1.2 smd: 1(-0.94,-1.245) 2(0.986,-1.25) 3(0.005,1.25)
  silkscreen extent -1.65,-1.71 1.66,1.27, body extent -1.47,-1.33 1.53,1.17, height 1.06
XCVR_SIM7600E [mm]
  oval 1.8x0.6 smd: 1(-15.1,9.5) 2(-15.1,8.5) 3(-15.1,7.5) 4(-15.1,6.5) 5(-15.1,5.5) 6(-15.1,4.5) 7(-15.1,3.5) 8(-15.1,2.5) 9(-15.1,1.5) 10(-15.1,0.5) 11(-15.1,-0.5) 12(-15.1,-1.5) 13(-15.1,-2.5) 14(-15.1,-3.5) 15(-15.1,-4.5) 16(-15.1,-5.5) 17(-15.1,-6.5) 18(-15.1,-7.5) 19(-15.1,-8.5) 20(-15.1,-9.5) 41(15.1,-9.5) 42(15.1,-8.5) 43(15.1,-7.5) 44(15.1,-6.5) 45(15.1,-5.5) 46(15.1,-4.5) 47(15.1,-3.5) 48(15.1,-2.5) 49(15.1,-1.5) 50(15.1,-0.5) 51(15.1,0.5) 52(15.1,1.5) 53(15.1,2.5) 54(15.1,3.5) 55(15.1,4.5) 56(15.1,5.5) 57(15.1,6.5) 58(15.1,7.5) 59(15.1,8.5) 60(15.1,9.5) 81(-15.1,-10.5) 82(15.1,-10.5) 85(15.1,10.5)
  oval 0.6x1.8 smd: 21(-9.5,-15.1) 22(-8.5,-15.1) 23(-7.5,-15.1) 24(-6.5,-15.1) 25(-5.5,-15.1) 26(-4.5,-15.1) 27(-3.5,-15.1) 28(-2.5,-15.1) 29(-1.5,-15.1) 30(-0.5,-15.1) 31(0.5,-15.1) 32(1.5,-15.1) 33(2.5,-15.1) 34(3.5,-15.1) 35(4.5,-15.1) 36(5.5,-15.1) 37(6.5,-15.1) 38(7.5,-15.1) 39(8.5,-15.1) 40(9.5,-15.1) 61(9.5,15.1) 62(8.5,15.1) 63(7.5,15.1) 64(6.5,15.1) 65(5.5,15.1) 66(4.5,15.1) 67(3.5,15.1) 68(2.5,15.1) 69(1.5,15.1) 70(0.5,15.1) 71(-0.5,15.1) 72(-1.5,15.1) 73(-2.5,15.1) 74(-3.5,15.1) 75(-4.5,15.1) 76(-5.5,15.1) 77(-6.5,15.1) 78(-7.5,15.1) 79(-8.5,15.1) 80(-9.5,15.1) 83(10.5,-15.1) 84(-10.5,-15.1) 86(-10.5,15.1) 87(10.5,15.1)
  Keep-Out Layer region: -11.4,8.3 -13.8,8.3 -13.8,10.7 -11.4,10.7
  silkscreen extent -17.35,-15 15,15, body extent -15,-15 15,15, height 3.1
XH2.54M-2 [mm]
  rect 1.6x1.6 hole 0.8: 1(0,0)
  round 1.6 hole 0.8: 2(2.54,0)
  silkscreen extent -2.48,-2.26 5.02,3.46, body extent -2.48,-2.26 5.02,3.48, height 6.91
Y-3225 [mil]
  rect 46.87x33.03 smd paste+0 mask+0: 1(-42.44,-35.5) 2(44.44,-35.5) 3(44.44,27.5) 4(-42.44,27.5)
  silkscreen extent -60,-54 17,46, body extent -62,-53 64,45, height 24

## Part data
B1: library part 18650-2C
C1 C3 C4 C5 C7 C8 C9 C10 C11 C14 C15 C16 C17 C19 C20 C21 C22 C23 C24 C25 C26 C27 C28 C29 C30 C31 C32 C33 C34 C35 C36 C37 C41 C44 C45 C46 C47 C48 C51 C54 C55 C56 C57 C58 C59 C60 C61: library part Cap_NP, "Non-polarized capacitor"
C2 C6: library part Cap_Alu, "Polarized aluminum capacitor"
C12 C13 C18 C49 C50 C52 C53: library part Cap_Tatan, "Polarized tantaLum capacitor"
C38 C39 C40 C42 C43: "Non-polarized capacitor"
D1 D2 D3 D7: library part S-Diode, "Schottky diode"
D4 D8: library part LED, "Light Emitting Diode"
D5 D6 D12 D13: "Light Emitting Diode"
D9 D10: library part TVS-Diode, "TVS diode"
D11: "Integrated Circuit", Manufacturer_Name=STMicroelectronics, Mouser Part Number=511-ESDA6V1W5, Arrow Part Number=ESDA6V1W5, Arrow Price/Stock=https://www.arrow.com/en/products/esda6v1w5/stmicroelectronics?utm_currency=USD&region=nac, Datasheet Link=http://www.st.com/st-web-ui/static/active/en/resource/technical/document/datasheet/CD00064033.pdf, Height=1.1mm, Manufacturer_Part_Number=ESDA6V1W5, Mouser Price/Stock=https://www.mouser.co.uk/ProductDetail/STMicroelectronics/ESDA6V1W5?qs=9NrABl3fj%2FrhT5vdkOmqXg%3D%3D
J1: "WR-COM USB 2.0 Type C Receptacle Horizontal SMT", Manufacturer="Wurth Elektronik", Max Operating Temperature=85°C, Min Operating Temperature=-40°C, Rated Current=5, Working Voltage="48V (DC)", Application="USB 2.0", Category="Input/Output Connector", ComponentLink1Description="Website Link", ComponentLink1URL=https://www.we-online.com/redexpert/article/629722000214?ad, ComponentLink2Description="Datasheet Link", ComponentLink2URL=https://www.we-online.com/redexpert/spec/629722000214?ad, Gender=Receptacle, Interface Type="Type C", Manufacturer Part Number=629722000214, Match Code=WR-USB, Mount="Surface Mount", Number of Pins=16, Number of Ports=1, Orientation=Horizontal, Packaging="Tape and Reel"
J2 J5 J6 J7: "ATENNA PIN 1"
J3: library part Conn_Cai_2P_2.54
J4: "WR-CRD SD Card Connector Push & Push Socket, 9 pins", Manufacturer="Wurth Elektronik", Max Operating Temperature="85 °C", Min Operating Temperature="-25 °C", Application="Micro SD Card", Category="Input/Output Connector", ComponentLink1Description="Website Link", ComponentLink1URL=https://www.we-online.com/redexpert/article/693071040911?ad, ComponentLink2Description="Datasheet Link", ComponentLink2URL=https://www.we-online.com/redexpert/spec/693071040911?ad, Durability="10000 Mating cycles", Gender=Socket, Manufacturer Part Number=693071040911, Match Code=WR-CRD, Mount="Surface Mount", Number of Pins=9, Packaging="Tape and Reel", Type="Push & Push"
J8: "Micro Simcard Socket"
L1 L2 L3: library part "Inductor Iron", "Magnetic-Core Inductor", LatestRevisionDate=17-Jul-2002, LatestRevisionNote="Re-released for DXP Platform.", PackageDescription="Axial Device, Thru-Hole; 2 Leads; 0.9 in Pin Spacing", PackageReference=AXIAL-0.9, Published=24-Mar-1999, Publisher="Altium Limited"
L4 L5 L6 L7 L8 L9: library part Inductor, "Inductor", Code_IEC=1005, Code_JEITA=0402, LatestRevisionDate=29-May-2009, LatestRevisionNote="IPC-7351 Footprint Added.", PackageDescription="Chip Inductor", PackageReference=0402-A, Published=8-Jun-2000, Publisher="Altium Limited"
P1: "WR-MPC4 THT Male Right Angled Header, pitch 4.2mm, 2p", Contact Resistance=10mOhm, Insulation Resistance=1000MOhm, Manufacturer="Wurth Elektronik", Max Operating Temperature=105°C, Min Operating Temperature=-40°C, Rated Current=9A, Working Voltage=600VAC, Category="Wire-to-Board Connectors", ComponentLink1Description="Website Link", ComponentLink1URL=https://www.we-online.com/redexpert/article/64900229522?ad, ComponentLink2Description="Datasheet Link", ComponentLink2URL=https://www.we-online.com/redexpert/spec/64900229522?ad, Gender=Male, Manufacturer Part Number=64900229522, Match Code=WR-MPC4, Mount="Through Hole", Number of Pins=2, Number of Rows=2, Orientation="Right Angled", Packaging=Tray, Pitch=4.2mm
P2: "WR-BHD Male Box Header, THT Straight, pitch 2.54 mm, 2 Rows, 6 Pins", Contact Resistance="20 mΩ", Insulation Resistance="1000 MΩ", Manufacturer="Wurth Elektronik", Max Operating Temperature="105 °C", Min Operating Temperature="-40 °C", Rated Current="3 A", Withstanding Voltage="500 V", Working Voltage="250 V", Category="Wire-to-Board Connector", ComponentLink1Description="Website Link", ComponentLink1URL=https://www.we-online.com/redexpert/article/61200621621?ad, ComponentLink2Description="Datasheet Link", ComponentLink2URL=https://www.we-online.com/redexpert/spec/61200621621?ad, Gender=Male, Height="9.1 mm", Length="15.28 mm", Manufacturer Part Number=61200621621, Match Code=WR-BHD, Mount="Through Hole", Number of Pins=6, Number of Rows=2, Orientation=Straight, Packaging=Tray, Pitch="2.54 mm", Width="9.1 mm"
Q1 Q2 Q3 Q4 Q5 Q6 Q7: library part N-Trans
R1 R2 R3 R4 R5 R6 R7 R8 R9 R10 R11 R12 R13 R14 R15 R16 R17 R18 R19 R20 R21 R22 R23 R24 R25 R26 R27 R28 R29 R30 R31 R32 R33 R34 R35 R36 R37 R38 R39 R40 R41 R42 R43 R44 R45 R46 R47 R48 R49 R50 R51 R52 R53 R54 R55 R56 R57 R58 R59: library part Resistor
SW1 SW2 SW3: "WS-TASV SMT Tact Switch, 6mm x 3.5mm, 160gf, SPST-NO, 12V, 50mA", Manufacturer="Wurth Elektronik", Max Operating Temperature=85°C, Min Operating Temperature=-40°C, Rated Current=50mA, Rated Voltage (DC)=12V, Category="Tact Switch", Circuit=SPST-NO, ComponentLink1Description="Website Link", ComponentLink1URL=https://www.we-online.com/redexpert/article/434121050816?ad, ComponentLink2Description="Datasheet Link", ComponentLink2URL=https://www.we-online.com/redexpert/spec/434121050816?ad, Contact Material="Stainless Steel", Contact Plating=Silver, Height=5mm, Length=6mm, Manufacturer Part Number=434121050816, Match Code=WS-TASV, Mount="Surface Mount", Operation Force=160gf, Packaging="Tape and Reel", Terminal Material="Copper Alloy", Terminal Plating=Silver, Washable=No, Width=3.5mm
U1: "5A, 30V, 420kHz Step-Down Converter", Package=None, Check_prices=https://www.snapeda.com/parts/MP2482/Monolithic+Power+Systems+Inc./view-part/?ref=eda, MF="Monolithic Power Systems Inc.", MP=MP2482, SnapEDA_Link=https://www.snapeda.com/parts/MP2482/Monolithic+Power+Systems+Inc./view-part/?ref=snap
U2: "1.2MHz 2A Step Up Converter 85T"
U3: "Linear Voltage Regulator IC Positive Fixed 1 Output 600mA SOT-25", Package="SOT-753 Diodes Inc.", Availability="In Stock", Check_prices=https://www.snapeda.com/parts/AP2112K-3.3TRG1/Diodes+Inc./view-part/?ref=eda, MF="Diodes Inc.", MP=AP2112K-3.3TRG1, Price=None, Purchase-URL=https://pricing.snapeda.com/search/part/AP2112K-3.3TRG1/?ref=eda, SnapEDA_Link=https://www.snapeda.com/parts/AP2112K-3.3TRG1/Diodes+Inc./view-part/?ref=snap
U4: "Complete single cell Li-Ion battery with a constant current / constant voltage linear charger", Package=Package, Availability="Not in stock", Check_prices=https://www.snapeda.com/parts/TP4056/NanJing+Top+Power+ASIC+Corp./view-part/?ref=eda, MF="NanJing Top Power ASIC Corp.", MP=TP4056, Price=None, SnapEDA_Link=https://www.snapeda.com/parts/TP4056/NanJing+Top+Power+ASIC+Corp./view-part/?ref=snap
U5: "2-A, 28-V Input, Step-Down DC-DC Converter"
U7: "I2C realtime clock (RTC)"
U8: library part W25Q256JV, "256M-bit (32MB) Serial Flash memory"
U9: "LTE-FDD/LTE-TDD/HSPA+/UMTS/EDGE/GPRS/GSM Module On Module 10Mbps 800MHz/850MHz/900MHz/1800MHz/2100MHz/2300MHz/2500MHz/2600MHz 3.4V to 4.2V 24dBm", Package="SMD-87 SIMCom", Check_prices=https://www.snapeda.com/parts/SIM7600E/SIMCom/view-part/?ref=eda, MF="SIMCom Wireless Solutions Limited", MP=SIM7600E, SnapEDA_Link=https://www.snapeda.com/parts/SIM7600E/SIMCom/view-part/?ref=snap
U10: "Accelerometer X, Y, Z Axis Â±2g, 4g, 6g, 8g, 16g 1.56Hz ~ 800Hz 16-LGA _3x3_", Package="LGA-16 STMicroelectronics", Availability=Unavailable, MF=STMicroelectronics, MP=LIS3DSH, Price=None, SnapEDA_Link=https://www.snapeda.com/parts/LIS3DSH/STMicroelectronics/view-part/422648/?ref=snap
Y1: library part Resonator

## Via types
v1: diameter 31.5, hole 19.68, Top Layer to Bottom Layer, tented both sides, 252 vias
v2: diameter 23.62, hole 11.81, Top Layer to Bottom Layer, tented both sides, 70 vias

## Nets (pads, with @x,y where several pads share a name; then routed paths per layer and width w, separated by ;. In a path a pad name is that pad's centre, name@x,y a point inside that pad or via, vN(x,y) a via of type N, cw(c..) or ccw(c..) an arc to the next point about the centre after c; other vN are vias at no path point)
0V: C2.2 C3.1 P1.1 R7.2 U1.4 U1.EXP
+1.8V: C55.1 C56.1 C57.1 R45.1 R46.1 R47.1 R48.1 R49.1 U9.15 | length 3390
  Top Layer w6.3: v1@557.73,1395.03 v1(559.06,1393.7)
  Top Layer w19.68: U9.15@455.26,1395.03 v1@557.73,1395.03 ; R47.1@1385,2549.53 C55.1@1435,2549.53 R45.1@1610,2549.53 1855.94,2549.53 C57.1@1865,2540.47 R49.1@1915,2540.47 1919.06,2544.53 R48.1@1985,2544.53 C56.1@2040,2544.53 R46.1@2225,2544.53 2227.72,2547.24 v1(2275.59,2547.24)
  Bottom Layer w19.68: v1(559.06,1393.7) 744.88,1393.7 1429.92,2078.74 2087.4,2078.74 2311.81,2303.15 2311.81,2511.03 v1(2275.59,2547.24)
+3.3V-MCU: C24.2 C25.2 C26.2 C30.2 C31.2 L5.1 U6.2 U6.3 U6.20 U6.46 U6.55 U6.56 | length 2210.8
  Top Layer w6.3: U6.20@1139.99,3165.81 1175.81,3165.81 1185,3175 1185,3236.31 1188.69,3240 1346.31,3240 1350,3243.69 1350,3281.34 U6.3@1350.62,3281.96 ; U6.46@1419.51,3087.07 1386.62,3087.07 1380,3093.69 1380,3225 1383.81,3228.81 U6.55@1419.51,3228.81
  Top Layer w31.5: C30.2@1601.04,3367.98 C24.2@1651.04,3367.98 ; C24.2@1651.51,3367.98 C26.2@1701.04,3367.98 C31.2@1751.04,3367.98 C25.2@1801.04,3367.98 2952.02,3367.98 2991.12,3407.07 L5.1@3264.75,3407.07
+5V: C5.2 C6.1 C7.2 C8.2 C16.2 C17.2 C18.1 D1.2 D2.2 R2.2 R3.2 R12.2 R13.2 U3.1 U3.3 U4.4 U4.8 U5.2 | length 1593.2
  Top Layer w15.75: R2.2@2184.28,552.19 2188.48,556.39 2216.39,556.39 2250,590 2250,695 2347.19,792.19 R12.2@2835.22,792.19 ; R13.2@2835.47,725 2835.47,495.47 2862.34,468.61 2901.4,468.61 2929.75,440.26 C6.1@2929.75,408.77 ; R13.2@2835.22,725 R12.2@2835.22,792.19 ; R13.2@2835.22,725 R12.2@2835.22,792.19 ; R13.2@2835.22,725 R12.2@2835.22,792.19 ; R13.2@2835.22,725 R12.2@2835.22,792.19 ; R13.2@2835.22,725 R12.2@2835.22,792.19 ; R13.2@2835.22,725 R12.2@2835.22,792.19
+12V: C2.1 D4.1 P1.2 R4.2 R8.1 U1.8 | length 511.5
  Top Layer w6.3: C2.1@1805,473.43 1805,611.31 1808.69,615 2050,615 R4.2@2060,605 2060,645 2067.66,652.66 R8.1@2129.75,652.66
ANT: C20.2 L4.1 U6.1 | length 331
  Top Layer w6.3: C20.2@1379.53,3455 1382.11,3452.42 U6.1@1382.11,3281.96 ; C20.2@1379.75,3455 L4.1@1379.75,3507.31 ; C20.2@1379.75,3455 L4.1@1379.75,3507.31 ; C20.2@1379.75,3455 L4.1@1379.75,3507.31
AUX-ANT: C42.2 R39.1 U9.59 | length 146
  Top Layer w6.3: U9.59@1644.24,1906.84 C42.2@1749.75,1906.84 R39.1@1790.22,1906.84
BATTERY+: B1.1 C4.2 C10.2 L1.1 R10.1 U2.4 U2.5 U4.5